# Altium PCB PCBCompartimentoVideo.PcbDoc
Units mm, origin at the board's own origin, x right, y up, seen from the top; angles counter-clockwise.
Board outline 120 x 68 mm, 2 copper layers (Top Layer, Bottom Layer), stack 1.571 mm thick; 13 components, 12 nets, 60 pads, 4 vias.
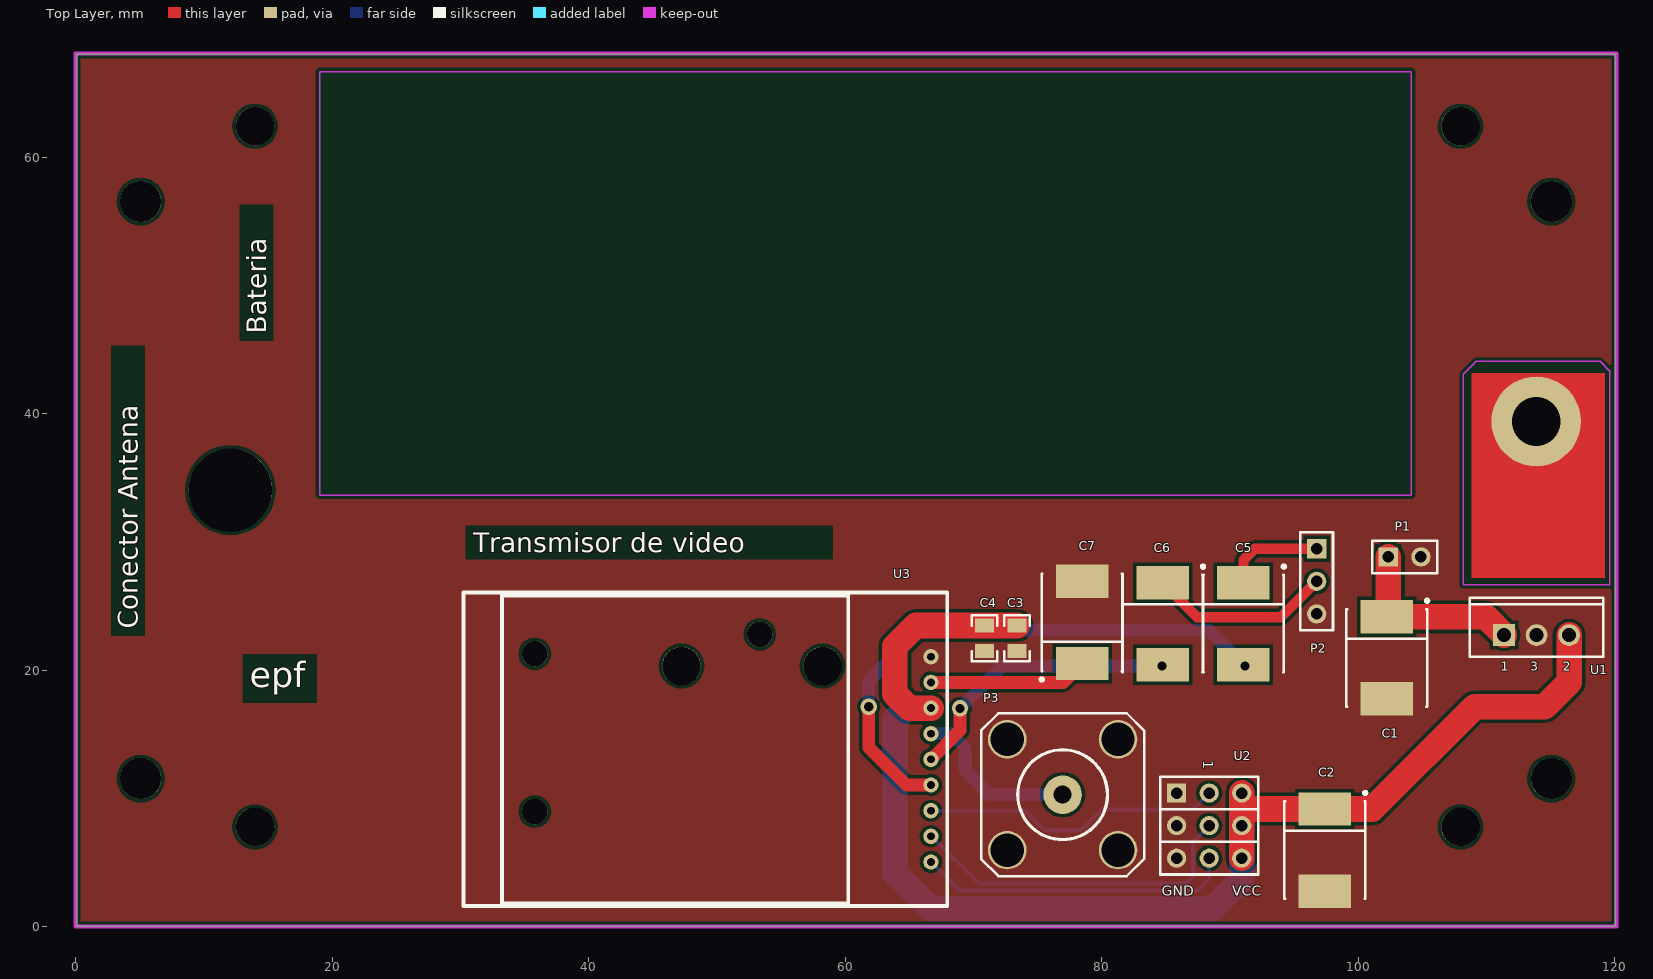
[diagram p0: Top Layer view]
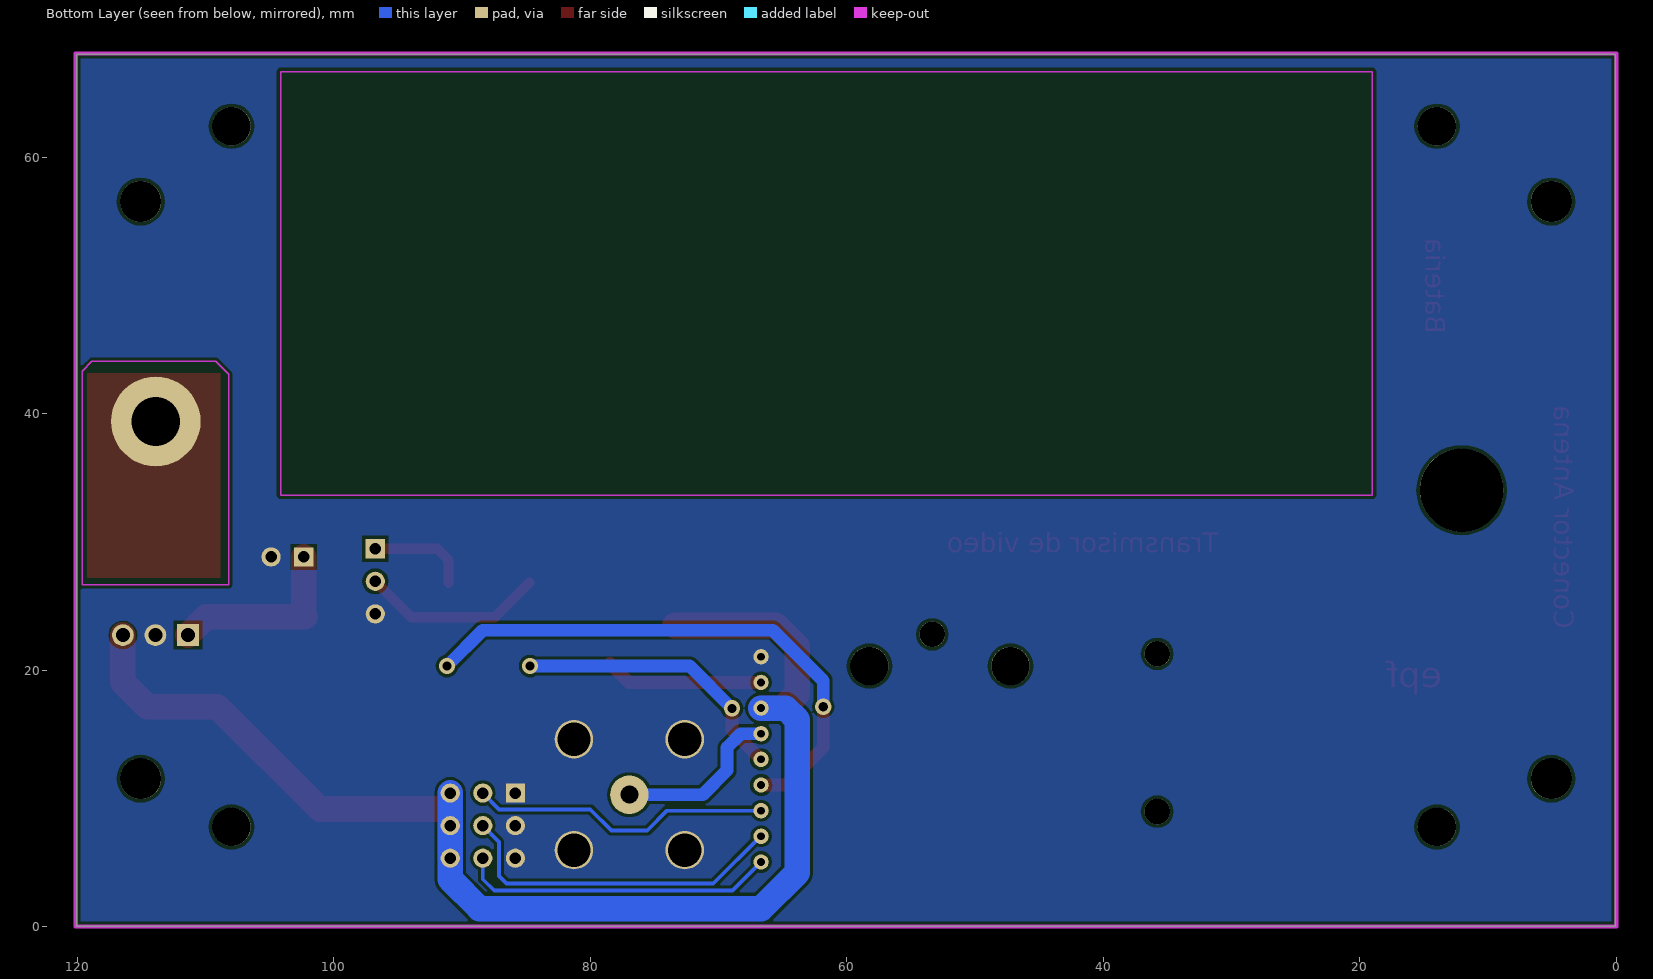
[diagram p1: Bottom Layer view, seen from below]

## Layer stack, top to bottom
Top Layer: signal copper 0.0356
Dielectric: core 1.5, FR-4, Dk 4.8
Bottom Layer: signal copper 0.0356

## Board outline
120.071,0.036 120.071,68.036 0.071,68.036 0.071,0.036

## Design rules (kind name [scope] priority, off if disabled: settings)
Clearance [All] p1: gap=0.254
HoleSize [All] p1: absolutevalues=TRUE maxlimit=8 minlimit=0.025 maxpercent=80.000 minpercent=20.000
PolygonConnect [All] p1: connectstyle=Direct reliefconductorwidth=0.254 reliefentries=4 polygonreliefangle="90 Angle"
RoutingVias [All] p1: holewidth=0.6 width=1.27 viastyle="Through Hole" minholewidth=0.6 minwidth=0.9 maxholewidth=7 maxwidth=10
SilkscreenOverComponentPads [All] p1: minsilkscreentomaskgap=0.254
SolderMaskExpansion [All] p1: expansion=0.102
Width [All] p1: maxlimit=3 minlimit=0.254 preferedwidth=0.254
26 further rules are at their usual default settings.

## Components (designator, comment, footprint, x,y, rotation, side; value= is the part's Value field where it differs from the comment)
C1 "Cap Pol2" TC7360-2924 102.235,20.955 r270 top
C2 "Cap Pol2" TC7360-2924 97.409,5.969 r270 top
C3 "Capacitor" 0805_CAP 73.406,22.479 r90 top
C4 "Capacitor" 0805_CAP 70.866,22.479 r90 top
C5 "Cap Pol2" TC7360-2924 91.059,23.622 r270 top
C6 "Cap Pol2" TC7360-2924 84.761,23.622 r270 top
C7 "Cap Pol2" TC7360-2924 78.486,23.72 r90 top
P1 "Header2" HEADER2MACHO 102.362,28.829 r0 top
P2 "Header 3" HDR1X3 96.774,29.464 r270 top
P3 "SMA2" SMA-4HOLE 76.962,10.287 r0 top
U1 "L78M05ABV" TO220V 113.919,22.733 r0 top
U2 "ConmutadorCanalesVideo" "HEADER 3X3" 85.852,10.414 r270 top
U3 "AWM667TX" AWM667TX 67.964,1.6 r0 top

## Footprints (in the part's own frame and the unit in brackets; to place one, negate y for a bottom-side part, rotate by r counter-clockwise, add the part's x,y. Pads: shape width x height; smd on the part's side, far side on the other; paste and mask are expansions set on the pad)
0805_CAP [mm]
  rect 1.1x1.5 smd: 1(-1,0) 2(1,0)
  silkscreen extent -1.8,-1 1.8,1, body extent -1,-0.62 1,0.63, height 0.78
AWM667TX [mm]
  round 2 hole 2: 0(-32.16,7.37) 0(-32.16,19.67) 0(-14.62,21.19)
  round 3 hole 3: 0(-20.72,18.72) 0(-9.72,18.72)
  round 1.2 hole 0.6: 1(-1.27,3.44) 2(-1.27,5.44) 3(-1.27,7.44) 4(-1.27,9.44) 5(-1.27,11.44) 6(-1.27,13.44) 7(-1.27,15.44) 8(-1.27,17.44) 9(-1.27,19.44)
  silkscreen extent -37.72,0 0,24.44, body extent -45.19,0 0,24.44, height 14.04
HDR1X3 [mm] "Connector; Header; 3 Position"
  rect 1.5x1.5 hole 0.9: 1(0,0)
  round 1.5 hole 0.9: 2(2.54,0) 3(5.08,0)
  silkscreen extent -1.27,-1.27 6.35,1.27
HEADER2MACHO [mm]
  rect 1.5x1.5 hole 0.9: 1(0,0)
  round 1.5 hole 0.9: 2(2.54,0)
  silkscreen extent -1.27,-1.27 3.81,1.27, body extent -1.27,-1.25 3.81,1.25, height 8.55
"HEADER 3X3" [mm]
  round 1.5 hole 0.9: 1(0,2.54) 2(2.54,2.54) 3(5.08,2.54) 4(0,5.08) 4(2.54,5.08) 4(5.08,5.08) 5(2.54,0) 5(5.08,0)
  rect 1.5x1.5 hole 0.9: 5(0,0)
  silkscreen extent -1.27,-1.27 6.35,6.35, body extent -1.27,-1.25 6.35,6.33, height 8.55
SMA-4HOLE [mm]
  round 3 hole 2.6: 0(-4.32,-4.32) 0(-4.32,4.32) 0(4.32,-4.32) 0(4.32,4.32)
  round 3 hole 1.4: 1(0,0)
  silkscreen extent -6.35,-6.35 6.35,6.35, body extent -6.35,-6.35 6.35,6.35, height 9.58
TC7360-2924 [mm] "Capacitor, SM Tantalum; Body 7.3 x 6.0 mm (LxW typ)"
  rect 2.6x4.1 smd: 1(-3.2,0) 2(3.2,0)
  silkscreen extent -4.57,-3.15 3.8,3.27, body extent -3.65,-2.15 3.65,2.15, height 4.11
TO220V [mm] "TO, Thru-Hole, Vertical, Heatsink Mounted; 3 In-Line Leads; Pitch 2.54 mm; Pin sequence 1, 3, 2"
  round 7 hole 3.8: 0(-0.025,16.662)
  rect 1.7x1.7 hole 1.1: 1(-2.54,0)
  round 1.7 hole 1.1: 2(2.54,0) 3(0,0)
  silkscreen extent -5.2,-1.7 5.2,2.9, body extent -5.03,-0.25 4.97,19.45, height 4.5

## Part data
C1 C2 C5 C6 C7: "Polarized Capacitor (Axial)"
C3 C4: library part Cap
P2: "Header, 3-Pin"
P3: "BNC Elbow Connector"
U1: "Precision 500mA Regulator"

## Free pads (board coordinates)
  round 3.2 hole 3.2: 1(5.071,11.536) 1(5.071,56.536) 1(115.071,11.536) 1(115.071,56.536)
  round 6.5 hole 6.5: 1(12.071,34.036)
  round 3 hole 3: 1(13.991,7.774) 1(13.991,62.413) 1(107.991,7.774) 1(107.991,62.413)

## Via types
v1: diameter 1.27, hole 0.711, Top Layer to Bottom Layer, 4 vias

## Nets (pads, with @x,y where several pads share a name; then routed paths per layer and width w, separated by ;. In a path a pad name is that pad's centre, name@x,y a point inside that pad or via, vN(x,y) a via of type N, cw(c..) or ccw(c..) an arc to the next point about the centre after c; other vN are vias at no path point)
A/L: C6.1 P2.2 | length 14.3
  Top Layer w0.8: C6.1 87.453,24.13 93.98,24.13 P2.2
A/R: C5.1 P2.1 | length 7.8
  Top Layer w0.8: C5.1 91.059,28.575 91.948,29.464 P2.1
BIT0: U2.1 U3.3 | length 23.5
  Bottom Layer w0.3: U3.3 74.018,9.04 75.565,7.493 78.359,7.493 80.01,9.144 87.122,9.144 U2.1
BIT1: U2.2 U3.2 | length 26.7
  Bottom Layer w0.3: U3.2 66.747,7.04 70.425,3.362 86.547,3.362 87.122,3.937 87.122,6.604 U2.2
BIT2: U2.3 U3.1 | length 24.6
  Bottom Layer w0.3: U3.1 68.926,2.808 87.503,2.808 88.392,3.697 U2.3
GND: C1.2 C2.2 C3.1 C4.1 C7.2 P1.2 P2.3 P3.0 U1.3 U2.5 U3.9
NetC5_2: C5.2 U3.4 | length 43.4
  Top Layer w1: v1(61.849,17.145) 61.849,13.97 64.779,11.04 U3.4
  Bottom Layer w1: v1(61.849,17.145) 61.849,19.177 65.786,23.114 88.392,23.114 v1(91.186,20.32)
NetC6_2: C6.2 U3.5 | length 22
  Top Layer w1: U3.5 68.961,15.307 v1(68.961,17.018)
  Bottom Layer w1: v1(68.961,17.018) 72.263,20.32 v1(84.709,20.32)
NetC7_1: C7.1 U3.8 | length 12.4
  Top Layer w1: U3.8 77.006,19.04 C7.1
VCC: C2.1 C3.2 C4.2 U1.2 U2.4 U3.7 | length 106.6
  Top Layer w2: U3.7 65.002,17.04 63.881,18.161 63.881,21.844 65.516,23.479 C4.2 C3.2 ; U2.4@90.932,5.334 90.932,7.874 90.932,9.271 ; U2.4@90.932,10.414 90.932,9.271 ; U1.2 116.459,19.05 114.554,17.145 109.093,17.145 101.117,9.169 C2.1 91.034,9.169 90.932,9.271
  Bottom Layer w2: U3.7 64.792,17.04 63.881,16.129 63.881,4.198 66.675,1.404 88.653,1.404 90.932,3.683 90.932,5.334 90.932,7.874 U2.4@90.932,10.414
VIDEO: P3.1 U3.6 | length 13.3
  Bottom Layer w1: U3.6 68.272,15.04 69.342,13.97 69.342,12.192 71.247,10.287 P3.1
VIN: C1.1 P1.1 U1.1 | length 14.5
  Top Layer w2: P1.1 102.362,24.282 C1.1 109.957,24.155 U1.1
pads on no net: U1.0 U3.0

## Polygon pours and split planes (outlines as drawn)
GND on Bottom Layer "BOTTOMGND" (solid, remove dead copper, pour order 3): 0,0 0,68.072 120.142,68.072 120.142,0
GND on Top Layer "TOPGND" (solid, remove dead copper, pour order 4): 0,0 0,68.072 120.142,68.072 120.142,0

## Keep-outs
Keep-Out Layer:
  lines w0.1: 19.05,33.655 104.14,33.655 104.14,66.675 19.05,66.675 19.05,33.655 ; 108.204,26.67 119.634,26.67 119.634,43.307 118.872,44.069 109.22,44.069 108.204,43.053 108.204,26.67
  lines w0.3: 0,0 0,68.072 120.142,68.072 120.142,0 0,0
  text "Capa de borde de PCB" at 128.778,10.16 h1.5

## Other copper
Top Layer:
  rectangle: 108.839,27.178 119.253,43.18
  text "Bateria" at 14.859,46.228 h1.5 r90
  text "Transmisor de video" at 30.988,29.21 h1.5
  text "Conector Antena" at 4.826,23.241 h1.5 r90
  text "epf" at 13.589,18.669 h2

## Silkscreen, mask and mechanical layers (free items; w line width, h text height)
Top Overlay:
  text "Bateria" at 14.859,46.228 h1.5 r90
  text "Transmisor de video" at 30.988,29.21 h1.5
  text "Conector Antena" at 4.826,23.241 h1.5 r90
  text "epf" at 13.589,18.669 h2
Mechanical 3:
  circle w0.3: c12.071,34.036 r3.4
  text "Capa de corte interior" at 128.651,14.732 h1.5

## Text inside footprints (layer, text, board x,y; h text height)
U1: Top Overlay "3" at 113.419,19.947 h0.7; Top Overlay "2" at 115.959,19.947 h0.7; Top Overlay "1" at 111.129,19.947 h0.7
U2: Top Overlay "GND" at 84.709,2.413 h0.8; Top Overlay "VCC" at 90.17,2.413 h0.8; Top Overlay "1" at 87.935,12.954 h0.8 r270